# Altium PCB Ausgangsstufe.PcbDoc
Units mm, origin at the board's own origin, x right, y up, seen from the top; angles counter-clockwise.
Board outline 150 x 75 mm, 2 copper layers (Top Layer, Bottom Layer); 196 components, 134 nets, 537 pads, 8 vias.
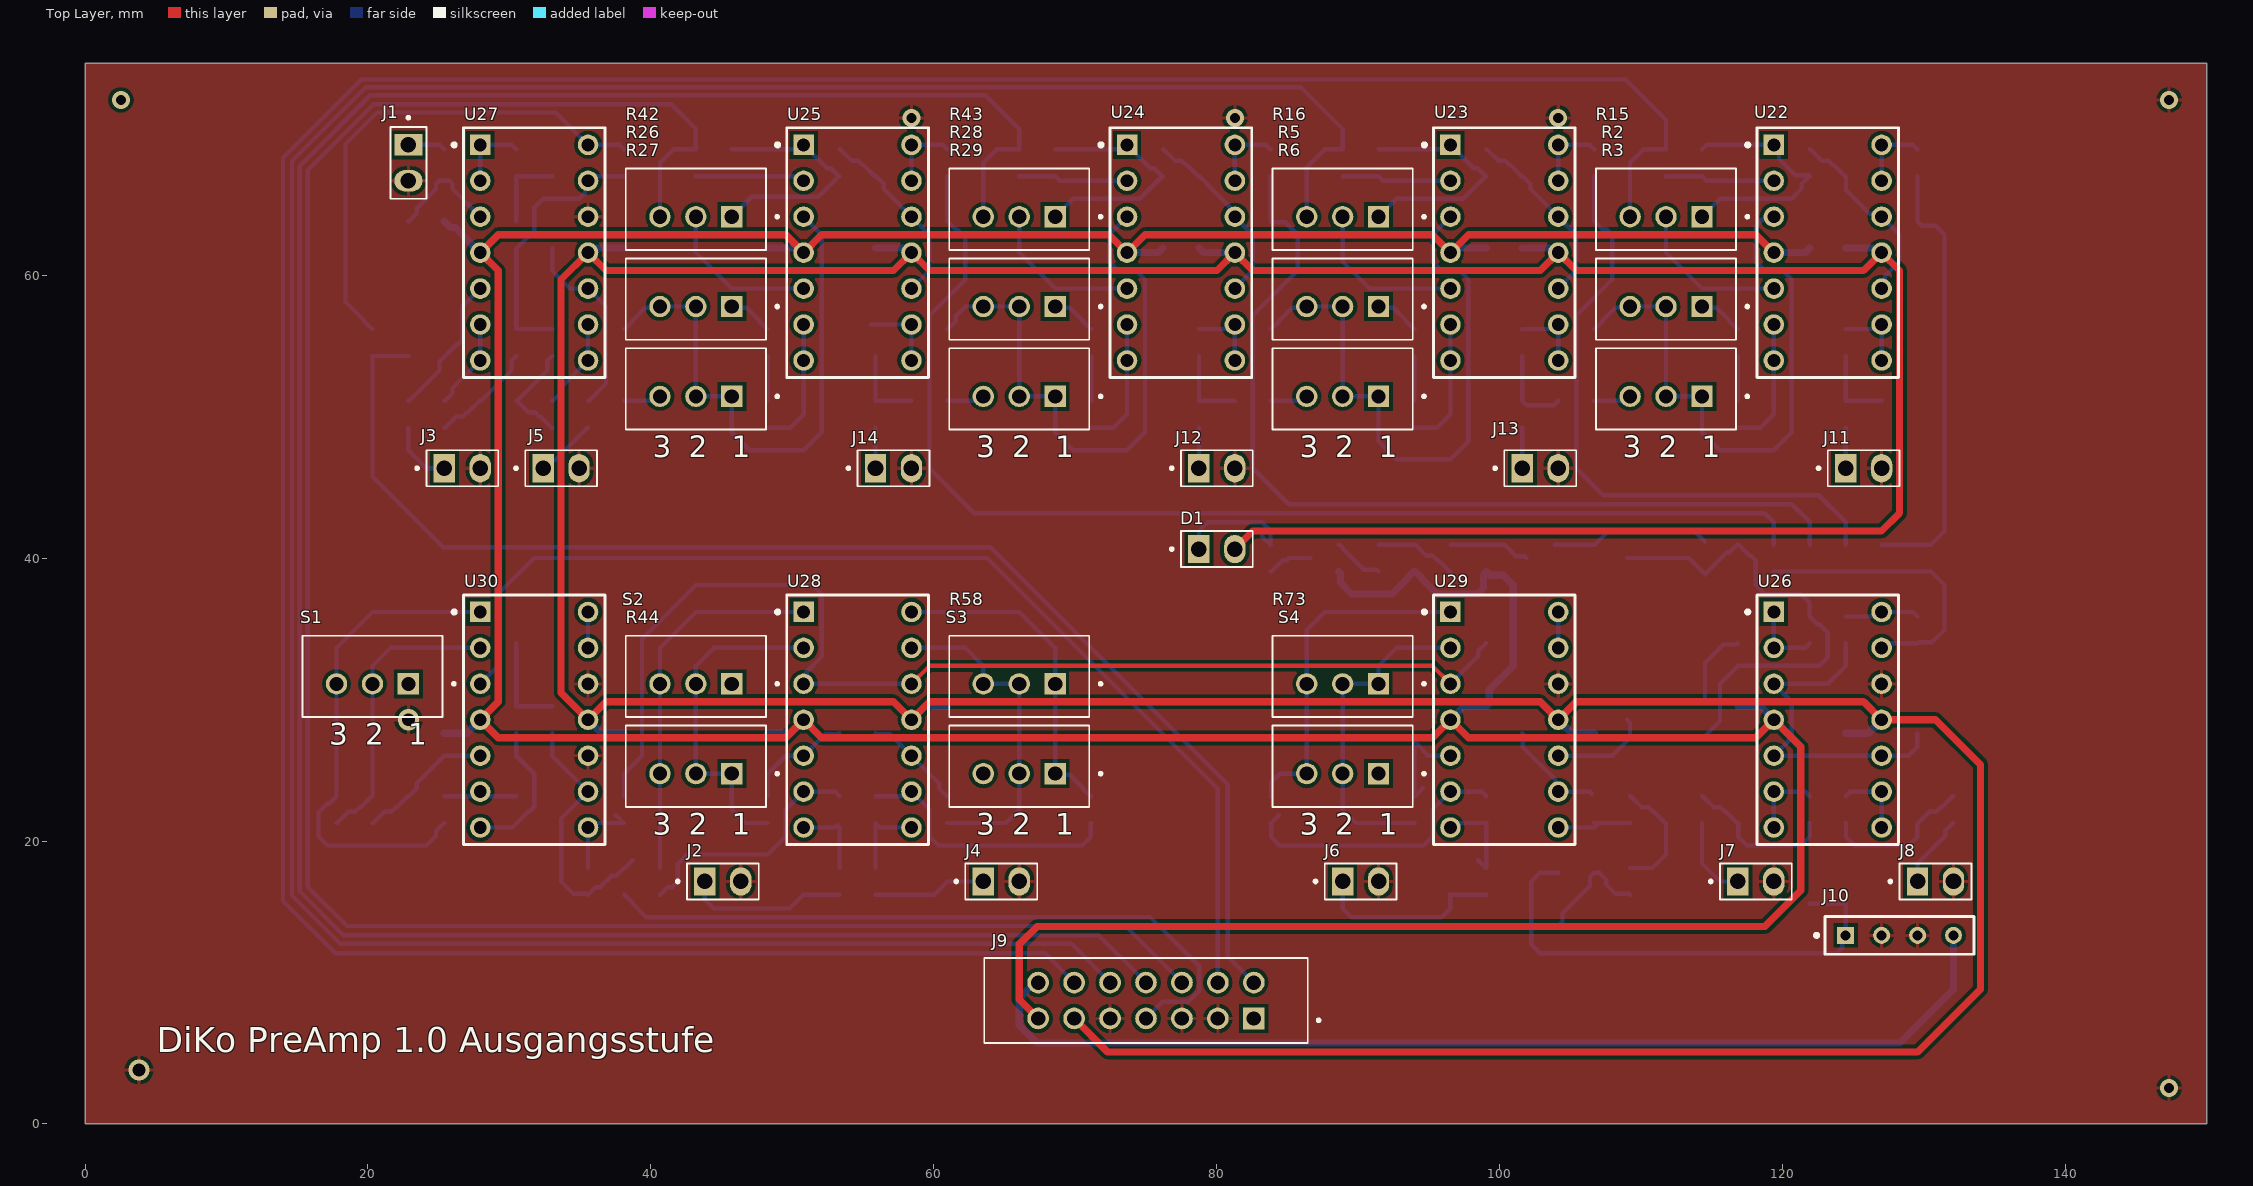
[diagram p0: Top Layer view]
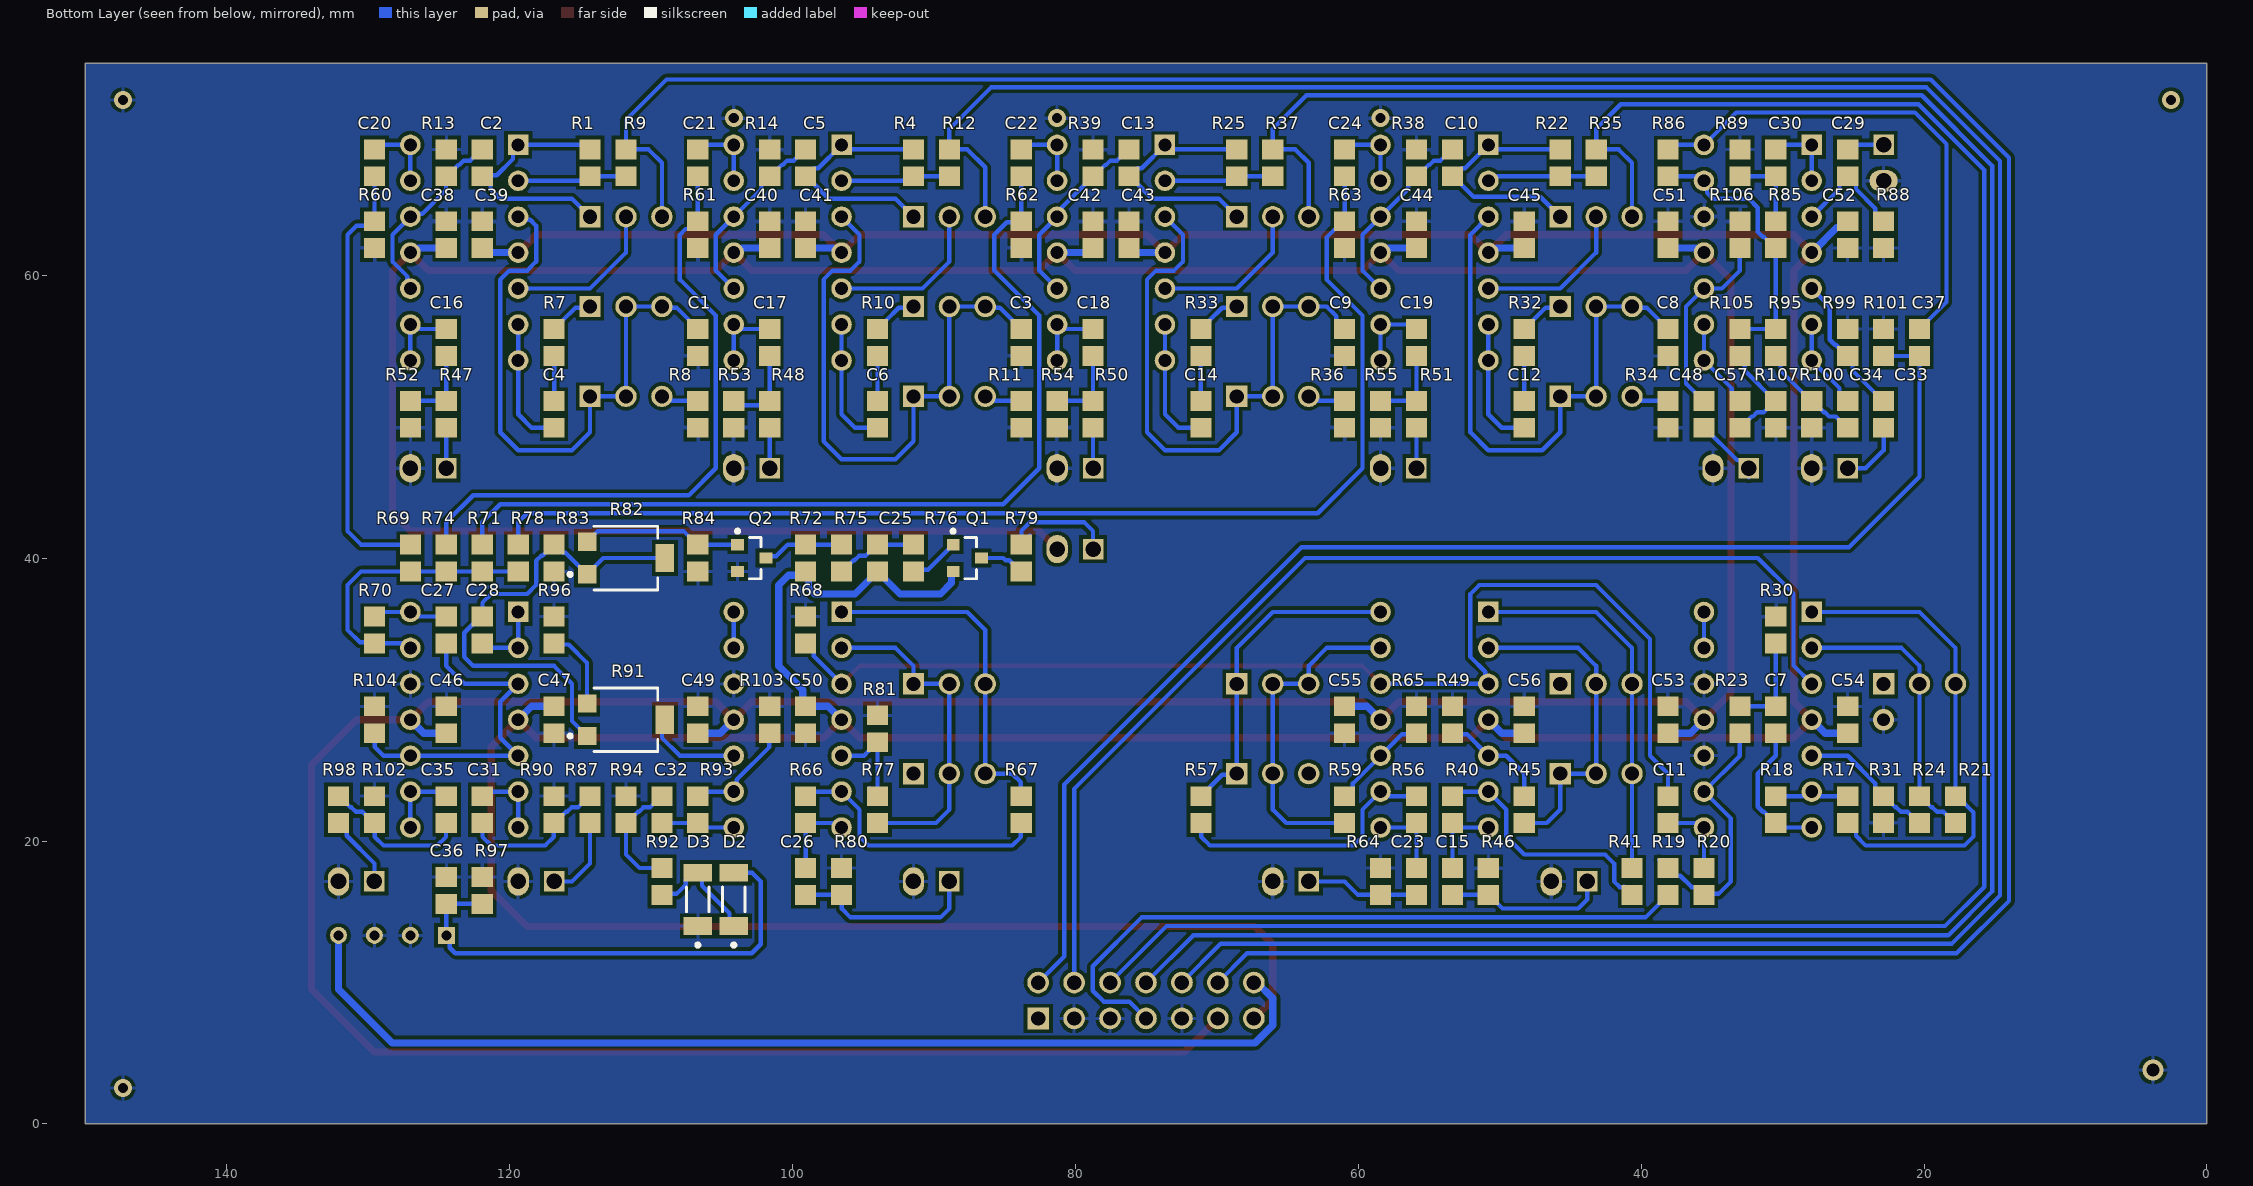
[diagram p1: Bottom Layer view, seen from below]
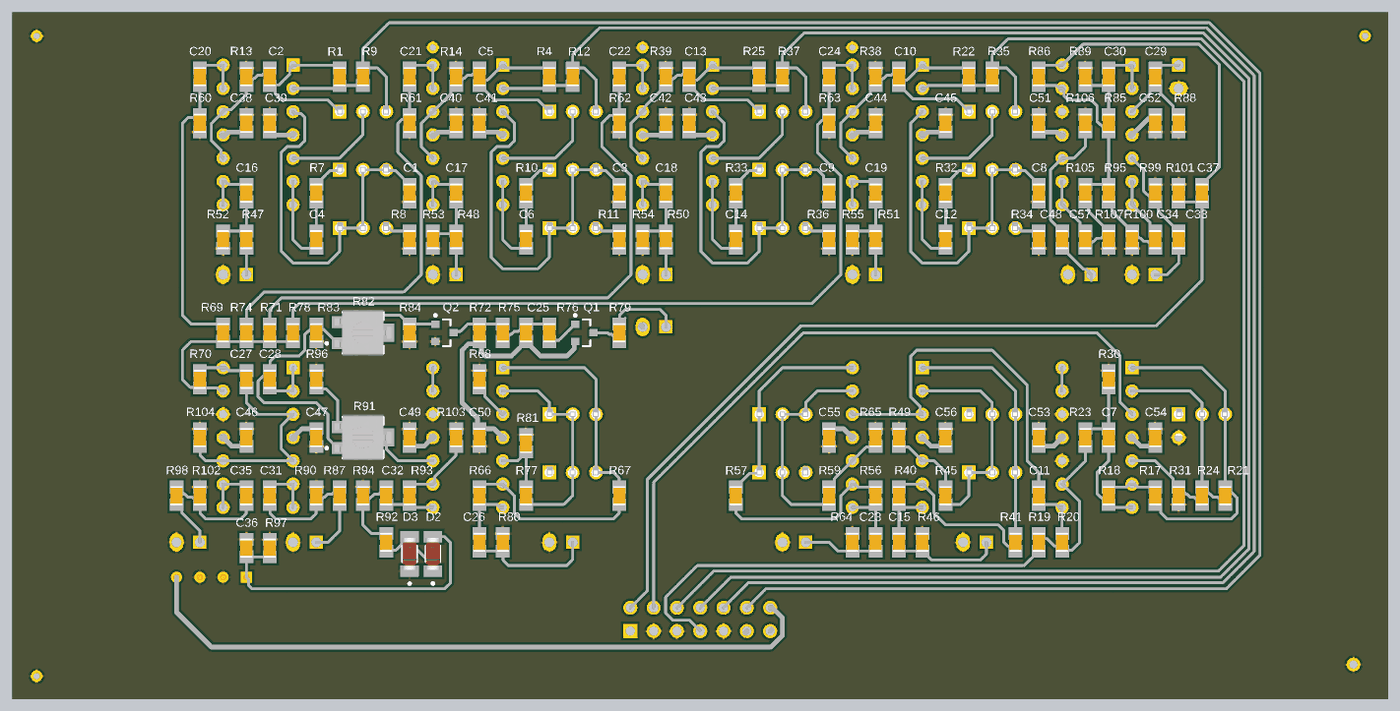
[diagram p2: 3D render of the assembled board from below, using the file's embedded part models]

## Layer stack, top to bottom
Top Solder: solder mask 0.0102, Solder Resist, Dk 3.5
Top Layer: signal copper 0.0356
Dielectric 1: dielectric 0.32, FR-4, Dk 4.8
Bottom Layer: signal copper 0.0356
Bottom Solder: solder mask 0.0102, Solder Resist, Dk 3.5

## Board outline
0,0 150,0 150,75 0,75

## Design rules (kind name [scope] priority, off if disabled: settings)
Clearance [All] p1: gap=0.254 ignorepadtopadclearanceinfootprint=FALSE except(0: Arc-Hole Track-Hole SMDPad-Hole THPad-Hole Via-Hole Fill-Hole Poly-Hole Region-Hole Text-Hole)
HoleSize [All] p1: absolutevalues=TRUE maxlimit=5.08 minlimit=0.152 maxpercent=80.000 minpercent=20.000
HoleToHoleClearance [All] p1: gap=0.203 allowstackedmicrovias=TRUE
MinimumSolderMaskSliver [All] p1: minsoldermaskwidth=0.102
PolygonConnect [All] p1: connectstyle=Relief reliefconductorwidth=0.254 reliefentries=4 polygonreliefangle="90 Angle" airgapwidth=0.254
RoutingVias [All] p1: holewidth=0.9 width=1.5 viastyle="Through Hole" minholewidth=0.711 minwidth=1.27 maxholewidth=0.914 maxwidth=1.524
SilkToSilkClearance [All] p1: silktosilkclearance=0.102
SilkToSolderMaskClearance [IsPad] p1: minsilkscreentomaskgap=0.152 clearancetoexposedcopper=TRUE
SolderMaskExpansion [All] p1: expansion=0.051 istentingtop=FALSE
UnRoutedNet [All] p1: checkbadconnections=TRUE
Width +18V [InNet('+18V')] p1: maxlimit=0.508 minlimit=0.508 preferedwidth=0.508
Width -18V [InNet('-18V')] p2: maxlimit=0.508 minlimit=0.508 preferedwidth=0.508
Width +6V [InNet('+6V')] p3: maxlimit=0.508 minlimit=0.508 preferedwidth=0.508
Width +5V_DP [InNet('5V_DP')] p4: maxlimit=0.508 minlimit=0.381 preferedwidth=0.381
Width [All] p5: maxlimit=0.305 minlimit=0.254 preferedwidth=0.305
24 further rules are at their usual default settings.

## Classes and differential pairs
component class KST/AUX: C7 C11 R17 R18 R19 R20 R21 R23 R24 R30 R31 S1 U30
component class AUX_Return: C29 C30 C33 C34 C37 C48 C57 R85 R86 R88 R89 R95 R99 R100 R101 R105 R106 R107 U27
component class VU_Meter: C32 C36 D2 D3 J10 R91 R92 R93 R94 R96 R97 R103 U29

## Components (designator, comment, footprint, x,y, rotation, side; value= is the part's Value field where it differs from the comment)
C1 "130n" 0805 106.68,55.245 r90 bottom
C2 "10u" 0805 121.92,67.945 r90 bottom
C3 "2.2n" 0805 83.82,55.245 r90 bottom
C4 "390n" 0805 116.84,50.165 r90 bottom
C5 "10u" 0805 99.06,67.945 r90 bottom
C6 "6.8n" 0805 93.98,50.165 r90 bottom
C7 "10u" 0805 30.48,28.575 r90 bottom
C8 "750p" 0805 38.1,55.245 r90 bottom
C9 "30n" 0805 60.96,55.245 r90 bottom
C10 "10u" 0805 53.34,67.945 r90 bottom
C11 "10u" 0805 38.1,22.225 r270 bottom
C12 "2.2n" 0805 48.26,50.165 r90 bottom
C13 "10u" 0805 76.2,67.945 r90 bottom
C14 "91n" 0805 71.12,50.165 r90 bottom
C15 "10u" 0805 53.34,17.145 r270 bottom
C16 "10u" 0805 124.46,55.245 r270 bottom
C17 "10u" 0805 101.6,55.245 r270 bottom
C18 "10u" 0805 78.74,55.245 r270 bottom
C19 "10u" 0805 55.88,55.245 r270 bottom
C20 "10u" 0805 129.54,67.945 r270 bottom
C21 "10u" 0805 106.68,67.945 r270 bottom
C22 "10u" 0805 83.82,67.945 r270 bottom
C23 "10u" 0805 55.88,17.145 r270 bottom
C24 "10u" 0805 60.96,67.945 r270 bottom
C25 "1u" 0805 93.98,40.005 r270 bottom
C26 "10u" 0805 99.06,17.145 r270 bottom
C27 "10u" 0805 124.46,34.925 r270 bottom
C28 "10u" 0805 121.92,34.925 r90 bottom
C29 "10u" 0805 25.4,67.945 r270 bottom
C30 "10u" 0805 30.48,67.945 r90 bottom
C31 "10u" 0805 121.92,22.225 r270 bottom
C32 "10u" 0805 109.22,22.225 r90 bottom
C33 "10u" 0805 22.86,50.165 r90 bottom
C34 "10u" 0805 25.4,50.165 r90 bottom
C35 "10u" 0805 124.46,22.225 r270 bottom
C36 "4.7u" 0805 124.46,16.51 r270 bottom
C37 "10u" 0805 20.32,55.245 r270 bottom
C38 "100n" 0805 124.46,62.865 r270 bottom
C39 "100n" 0805 121.92,62.865 r270 bottom
C40 "100n" 0805 101.6,62.865 r270 bottom
C41 "100n" 0805 99.06,62.865 r270 bottom
C42 "100n" 0805 78.74,62.865 r270 bottom
C43 "100n" 0805 76.2,62.865 r270 bottom
C44 "100n" 0805 55.88,62.865 r270 bottom
C45 "100n" 0805 48.26,62.865 r270 bottom
C46 "100n" 0805 124.46,28.575 r270 bottom
C47 "100n" 0805 116.84,28.575 r90 bottom
C48 "10u" 0805 35.56,50.165 r270 bottom
C49 "100n" 0805 106.68,28.575 r270 bottom
C50 "100n" 0805 99.06,28.575 r90 bottom
C51 "100n" 0805 38.1,62.865 r270 bottom
C52 "100n" 0805 25.4,62.865 r90 bottom
C53 "100n" 0805 38.1,28.575 r270 bottom
C54 "100n" 0805 25.4,28.575 r270 bottom
C55 "100n" 0805 60.96,28.575 r90 bottom
C56 "100n" 0805 48.26,28.575 r270 bottom
C57 "10u" 0805 33.02,50.165 r90 bottom
D1 "WP710A10LGD" "Connector x2" 80.01,40.64 r0 top
D2 "1N4148WS-7-F" "1N4148 Diode" 104.14,15.875 r90 bottom
D3 "1N4148WS-7-F" "1N4148 Diode" 106.68,15.875 r90 bottom
J1 "Connector x2" "Connector x2" 22.86,67.945 r270 top
J2 "Connector x2" "Connector x2" 45.085,17.145 r0 top
J3 "Connector x2" "Connector x2" 26.67,46.355 r0 top
J4 "Connector x2" "Connector x2" 64.77,17.145 r0 top
J5 "Connector x2" "Connector x2" 33.655,46.355 r0 top
J6 "Connector x2" "Connector x2" 90.17,17.145 r0 top
J7 "Connector x2" "Connector x2" 118.11,17.145 r0 top
J8 "Connector x2" "Connector x2" 130.81,17.145 r0 top
J9 "Connector x14" "Connector x14" 75,10 r0 top
J10 "VU Meter" "Connector x4" 128.27,13.335 r0 top
J11 "Connector x2" "Connector x2" 125.73,46.355 r0 top
J12 "Connector x2" "Connector x2" 80.01,46.355 r0 top
J13 "Connector x2" "Connector x2" 102.87,46.355 r0 top
J14 "Connector x2" "Connector x2" 57.15,46.355 r0 top
Q1 "BC807-40LT1G" "SOT23 Transistor" 87.63,40.005 r180 bottom
Q2 "BC817-40,215" "SOT23 Transistor" 102.87,40.005 r180 bottom
R1 "22k" 0805 114.3,67.945 r90 bottom
R2 "22k log/str" "Connector x3" 111.76,57.785 r0 top
R3 "22k log/str" "Connector x3" 111.76,51.435 r0 top
R4 "22k" 0805 91.44,67.945 r90 bottom
R5 "470k log/str" "Connector x3" 88.9,57.785 r0 top
R6 "470k log/str" "Connector x3" 88.9,51.435 r0 top
R7 "6.8k" 0805 116.84,55.245 r90 bottom
R8 "6.8k" 0805 106.68,50.165 r90 bottom
R9 "22k" 0805 111.76,67.945 r270 bottom
R10 "6.8k" 0805 93.98,55.245 r90 bottom
R11 "6.8k" 0805 83.82,50.165 r90 bottom
R12 "22k" 0805 88.9,67.945 r270 bottom
R13 "220k" 0805 124.46,67.945 r270 bottom
R14 "220k" 0805 101.6,67.945 r270 bottom
R15 "47k lin" "Connector x3" 111.76,64.135 r0 top
R16 "47k lin" "Connector x3" 88.9,64.135 r0 top
R17 "10k" 0805 25.4,22.225 r90 bottom
R18 "10k" 0805 30.48,22.225 r270 bottom
R19 "10k" 0805 38.1,17.145 r270 bottom
R20 "10k" 0805 35.56,17.145 r90 bottom
R21 "10k" 0805 17.78,22.225 r90 bottom
R22 "22k" 0805 45.72,67.945 r90 bottom
R23 "10k" 0805 33.02,28.575 r90 bottom
R24 "5k" 0805 20.32,22.225 r270 bottom
R25 "22k" 0805 68.58,67.945 r90 bottom
R26 "22k log/str" "Connector x3" 43.18,57.785 r0 top
R27 "22k log/str" "Connector x3" 43.18,51.435 r0 top
R28 "47k log/str" "Connector x3" 66.04,57.785 r0 top
R29 "47k log/str" "Connector x3" 66.04,51.435 r0 top
R30 "220k" 0805 30.48,34.925 r270 bottom
R31 "5k" 0805 22.86,22.225 r90 bottom
R32 "6.8k" 0805 48.26,55.245 r90 bottom
R33 "6.8k" 0805 71.12,55.245 r90 bottom
R34 "6.8k" 0805 38.1,50.165 r90 bottom
R35 "22k" 0805 43.18,67.945 r270 bottom
R36 "6.8k" 0805 60.96,50.165 r90 bottom
R37 "22k" 0805 66.04,67.945 r270 bottom
R38 "220k" 0805 55.88,67.945 r270 bottom
R39 "220k" 0805 78.74,67.945 r270 bottom
R40 "10k" 0805 53.34,22.225 r270 bottom
R41 "4k7" 0805 40.64,17.145 r270 bottom
R42 "47k lin" "Connector x3" 43.18,64.135 r0 top
R43 "47k lin" "Connector x3" 66.04,64.135 r0 top
R44 "22k log" "Connector x3" 43.18,24.765 r0 top
R45 "470R" 0805 48.26,22.225 r90 bottom
R46 "220k" 0805 50.8,17.145 r270 bottom
R47 "470R" 0805 124.46,50.165 r270 bottom
R48 "470R" 0805 101.6,50.165 r270 bottom
R49 "1k" 0805 53.34,28.575 r270 bottom
R50 "470R" 0805 78.74,50.165 r270 bottom
R51 "470R" 0805 55.88,50.165 r270 bottom
R52 "220k" 0805 127,50.165 r90 bottom
R53 "220k" 0805 104.14,50.165 r90 bottom
R54 "220k" 0805 81.28,50.165 r90 bottom
R55 "220k" 0805 58.42,50.165 r90 bottom
R56 "10k" 0805 55.88,22.225 r270 bottom
R57 "4k7" 0805 71.12,22.225 r270 bottom
R58 "22k log" "Connector x3" 66.04,31.115 r0 top
R59 "470R" 0805 60.96,22.225 r90 bottom
R60 "220k" 0805 129.54,62.865 r90 bottom
R61 "220k" 0805 106.68,62.865 r90 bottom
R62 "220k" 0805 83.82,62.865 r90 bottom
R63 "220k" 0805 60.96,62.865 r90 bottom
R64 "220k" 0805 58.42,17.145 r270 bottom
R65 "1k" 0805 55.88,28.575 r270 bottom
R66 "10k" 0805 99.06,22.225 r270 bottom
R67 "4k7" 0805 83.82,22.225 r270 bottom
R68 "220k" 0805 99.06,34.925 r270 bottom
R69 "10k" 0805 127,40.005 r270 bottom
R70 "10k" 0805 129.54,34.925 r90 bottom
R71 "10k" 0805 121.92,40.005 r270 bottom
R72 "4k7" 0805 99.06,40.005 r270 bottom
R73 "22k log" "Connector x3" 88.9,31.115 r0 top
R74 "10k" 0805 124.46,40.005 r270 bottom
R75 "220" 0805 96.52,40.005 r90 bottom
R76 "4k7" 0805 91.44,40.005 r90 bottom
R77 "470R" 0805 93.98,22.225 r90 bottom
R78 "10k" 0805 119.38,40.005 r270 bottom
R79 "3k9" 0805 83.82,40.005 r90 bottom
R80 "220k" 0805 96.52,17.145 r270 bottom
R81 "1k" 0805 93.98,27.94 r270 bottom
R82 "50k lin" "SMD Trimmer 3314G" 111.76,40.005 r90 bottom
R83 "220k" 0805 116.84,40.005 r90 bottom
R84 "10k" 0805 106.68,40.005 r90 bottom
R85 "10k" 0805 30.48,62.865 r90 bottom
R86 "10k" 0805 38.1,67.945 r90 bottom
R87 "470R" 0805 114.3,22.225 r270 bottom
R88 "200k" 0805 22.86,62.865 r90 bottom
R89 "220k" 0805 33.02,67.945 r90 bottom
R90 "220k" 0805 116.84,22.225 r270 bottom
R91 "10k lin" "SMD Trimmer 3314G" 111.76,28.575 r90 bottom
R92 "1k8" 0805 109.22,17.145 r90 bottom
R93 "100k" 0805 106.68,22.225 r270 bottom
R94 "220k" 0805 111.76,22.225 r270 bottom
R95 "10k" 0805 30.48,55.245 r270 bottom
R96 "10k" 0805 116.84,34.925 r270 bottom
R97 "1k8" 0805 121.92,16.51 r90 bottom
R98 "470R" 0805 132.08,22.225 r270 bottom
R99 "200k" 0805 25.4,55.245 r270 bottom
R100 "220k" 0805 27.94,50.165 r270 bottom
R101 "220k" 0805 22.86,55.245 r270 bottom
R102 "220k" 0805 129.54,22.225 r270 bottom
R103 "18k" 0805 101.6,28.575 r270 bottom
R104 "220k" 0805 129.54,28.575 r270 bottom
R105 "10k" 0805 33.02,55.245 r270 bottom
R106 "200k" 0805 33.02,62.865 r270 bottom
R107 "220k" 0805 30.48,50.165 r270 bottom
S1 "Schalter Buchsenleiste" "Connector x3" 20.32,31.115 r0 top
S2 "Schalter Buchsenleiste" "Connector x3" 43.18,31.115 r0 top
S3 "Schalter Buchsenleiste" "Connector x3" 66.04,24.765 r0 top
S4 "Schalter Buchsenleiste" "Connector x3" 88.9,24.765 r0 top
U22 "OPA4134UA" "DIP14 IC Socket" 123.19,61.595 r90 top
U23 "OPA4134UA" "DIP14 IC Socket" 100.33,61.595 r90 top
U24 "OPA4134UA" "DIP14 IC Socket" 77.47,61.595 r90 top
U25 "OPA4134UA" "DIP14 IC Socket" 54.61,61.595 r90 top
U26 "OPA4134UA" "DIP14 IC Socket" 123.19,28.575 r90 top
U27 "OPA4134UA" "DIP14 IC Socket" 31.75,61.595 r90 top
U28 "OPA4134UA" "DIP14 IC Socket" 54.61,28.575 r90 top
U29 "OPA4134UA" "DIP14 IC Socket" 100.33,28.575 r90 top
U30 "OPA4134UA" "DIP14 IC Socket" 31.75,28.575 r90 top

## Footprints (in the part's own frame and the unit in brackets; to place one, negate y for a bottom-side part, rotate by r counter-clockwise, add the part's x,y. Pads: shape width x height; smd on the part's side, far side on the other; paste and mask are expansions set on the pad)
"1N4148 Diode" [mm]
  rect 1.25x2 smd paste+0 mask+0: 1(-1.875,0) 2(1.875,0)
  silkscreen extent -3.35,-0.8 0.87,0.8, body extent -1.75,-0.8 1.75,0.8, height 1.6
0805 [mm] "0805"
  rect 1.4x1.5 smd: 1(-0.95,0) 2(0.95,0)
  body extent -1.05,-0.67 1.05,0.67, height 1.35
"Connector x2" [mm]
  rect 1.508x2 / inner round 1.45 / far side rect 1.45x1.45 hole 1.1: 1(-1.27,0)
  oval 1.508x2 hole 1.1: 2(1.27,0)
  silkscreen extent -3.29,-1.27 2.54,1.27
"Connector x3" [mm] "Connector x3"
  rect 1.508x1.508 / inner round 1.508 / far side rect 1.508x1.508 hole 1: 1(2.54,0)
  round 1.508 hole 1: 2(0,0) 3(-2.54,0)
  silkscreen extent -4.95,-2.35 5.85,3.4, body extent -4.95,-2.35 4.95,3.4, height 7
"Connector x4" [mm]
  rect 1.2x1.2 hole 0.7 paste-1000 mask+0: 1(-3.81,0)
  round 1.2 hole 0.7 paste-1000 mask+0: 2(-1.27,0) 3(1.27,0) 4(3.81,0)
  silkscreen extent -5.99,-1.34 5.27,1.34, body extent -5.08,-1.27 5.08,1.27, height 4.45
"Connector x14" [mm]
  rect 1.53x1.53 hole 1.02: 1(7.62,-2.54)
  round 1.53 hole 1.02: 2(7.62,0) 3(5.08,-2.54) 4(5.08,0) 5(2.54,-2.54) 6(2.54,0) 7(0,-2.54) 8(0,0) 9(-2.54,-2.54) 10(-2.54,0) 11(-5.08,-2.54) 12(-5.08,0) 13(-7.62,-2.54) 14(-7.62,0)
  silkscreen extent -11.43,-4.27 12.3,1.73
"DIP14 IC Socket" [mm] "Socket, 14-Leads, Body 17.653x10.0076mm, Pitch 2.54mm"
  rect 1.45x1.45 hole 0.911: 1(7.62,3.81)
  round 1.45 hole 0.911: 2(5.08,3.81) 3(2.54,3.81) 4(0,3.81) 5(-2.54,3.81) 6(-5.08,3.81) 7(-7.62,3.81) 8(-7.62,-3.81) 9(-5.08,-3.81) 10(-2.54,-3.81) 11(0,-3.81) 12(2.54,-3.81) 13(5.08,-3.81) 14(7.62,-3.81)
  silkscreen extent -8.83,-5 8.83,5.78, body extent -8.83,-5 8.83,5, height 5.36
"SMD Trimmer 3314G" [mm] "SMD, 3-Leads, Body 4.5x4.5mm, Pitch 1.15mm"
  rect 1.3x1.3 smd: 1(-1.15,2.75) 3(1.15,2.75)
  rect 2x1.3 smd: 2(0,-2.75)
  silkscreen extent -2.25,-2.25 2.25,4.08, body extent -2.5,-3.1 2.5,3.1, height 2.73
"SOT23 Transistor" [mm] "SOT23, 3-Leads, Body 2.92x1.3mm, Pitch 0.95mm"
  rect 0.9x0.8 smd: 1(-1,0.95) 2(-1,-0.95) 3(1,0)
  silkscreen extent -1.13,-1.46 0.65,2.02, body extent -0.65,-1.46 0.65,1.46, height 1.11

## Part data
C1 C2 C3 C4 C5 C6 C7 C8 C9 C10 C11 C12 C13 C14 C15 C16 C17 C18 C19 C20 C21 C22 C23 C24 C25 C26 C27 C28 C29 C30 C31 C32 C33 C34 C35 C36 C37 C38 C39 C40 C41 C42 C43 C44 C45 C46 C47 C48 C49 C50 C51 C52 C53 C54 C55 C56 C57: library part "0805 Kondensator", "0805 Kondensator"
  C7 C11: ClassName=KST/AUX
  C29 C30 C33 C34 C37 C48 C57: ClassName=AUX_Return
  C32 C36: ClassName=VU_Meter
D1: library part "LED Buchsenleiste", "WP710A10LGD LED Thru-Hole PCB Green T-1 3mm Green Lens 2 mA 568 nm 2 mcd Round", Case/Package=Radial, Color=Green, Forward Current=2mA, Forward Voltage=1.9V, Max Junction Temperature (Tj)=110°C, Max Operating Temperature=85°C, Min Operating Temperature=-40°C, Power Dissipation=62.5mW, Reverse Voltage=5V, Dominant Wavelength=568nm, Height=4.6mm, Illumination Color=Green, Lead Free="Lead Free", Lens Color=Green, Lens Style="Diffused, Dome, Round, Tinted", Luminous Intensity=2mcd, Mount="Through Hole", NexarPartId=20090258, Number of LEDs=1, Number of Pins=3, Power Rating=62.5mW, RoHS=Compliant, Schedule B="8541402000, 8541402000|8541402000|8541402000|8541402000|8541402000", Test Current=2mA, Viewing Angle=40°, Wavelength=568nm
D2 D3: library part "1N4148 Diode", "Fast Switching Diode, 75 V, 0.3 A, -65 to 150 degC, 2-Pin SOD323, RoHS, Tape and Reel", ClassName=VU_Meter, ComponentLink1Description="Manufacturer URL", ComponentLink1URL=http://www.diodes.com/, ComponentLink2Description=Datasheet, ComponentLink2URL=http://www.diodes.com/datasheets/ds30097.pdf, DatasheetVersion="Rev. 25-2, 03/2016", PackageDescription="2-Pin Small Outline Diode, Body 1.7 x 1.3 mm", PackageReference=SOD323-2
J1 J2 J3 J4 J5 J6 J7 J8 J11 J12 J13 J14: "Connector Header Through Hole 2 position 0.100 (2.54mm)", Package=None, Check_prices=https://www.snapeda.com/parts/61300211121/Wurth+Elektronik/view-part/?ref=eda, MF="Wurth Elektronik", MP=61300211121, SnapEDA_Link=https://www.snapeda.com/parts/61300211121/Wurth+Elektronik/view-part/?ref=snap
J9: "14 Position Header Connector Through Hole", Package=None, Availability=Warning, Check_prices=https://www.snapeda.com/parts/SFH11-PBPC-D07-ST-BK/Sullins%20Connector%20Solutions/view-part/851415/?ref=eda, MF="Sullins Connector", MP=SFH11-PBPC-D07-ST-BK, Price=None, Purchase-URL=https://pricing.snapeda.com/search/part/SFH11-PBPC-D07-ST-BK/?ref=eda, SnapEDA_Link=https://www.snapeda.com/parts/SFH11-PBPC-D07-ST-BK/Sullins%20Connector%20Solutions/view-part/851415/?ref=snap, System=Connector
J10: library part "Connector x4", "CONN RCPT 4POS 0.1 GOLD PCB", Color=Black, Contact Resistance=10mR, Max Current Rating=1A, Max Operating Temperature=125°C, Min Operating Temperature=-55°C, Package Quantity=1, ClassName=VU_Meter, Connector Type=Receptacle, Contact Material=Copper, Contact Plating=Gold, Depth=2.54mm, Gender=Female, Housing Color=Black, Housing Material=Polyester, Lead Free="Lead Free", Length=10.16mm, Mount="Through Hole", Number of Contacts=4, Number of Positions=4, Number of Rows=1, Orientation=Straight, Packaging=Bulk, Pitch=2.54mm, Radiation Hardening=No, RoHS Compliant=Yes, Series=SS, Termination=Solder, Width=2.54mm
Q1: library part "SOT23 BC807 PNP", "General Purpose Transistor, PNP Silicon, 3-Pin SOT-23, Pb-Free, Tape and Reel", Manufacturer="On Semiconductor", ComponentLink1Description="Manufacturer URL", ComponentLink1URL=http://www.onsemi.com/, ComponentLink2Description=Datasheet, ComponentLink2URL=http://www.onsemi.com/pub_link/Collateral/BC807-16LT1-D.PDF, ComponentLink3Description="Package Specification", ComponentLink3URL=http://www.onsemi.cn/pub_link/Collateral/318-08.PDF, DatasheetVersion="Rev. 10", fT Min (MHz)=100, IC Continuous (A)=-0.5, Mounting Technology="Surface Mount", PackageDescription="3-Pin Small Outline Transistor, Body 2.92 x 1.3 mm, Pitch 0.95 mm", PackageReference=SOT-23-3-318-08, PackageVersion="Rev. AP, 11/2009", Packing="Tape and Reel", PartNumber=BC807-40LT1G, Polarity=PNP, RoHS=TRUE
Q2: library part "SOT23 BC817 NPN", "TRANS NPN 45V 0.5A SOT23", Ambient Temperature Range High=+150°C, Ambient Temperature Range Low=-65°C, Collector Base Voltage=50V, Collector Emitter Breakdown Voltage=45V, Collector Emitter Saturation Voltage=700mV, Emitter Base Voltage=5V, Manufacturer=Nexperia, Max Collector Current=500mA, Package=SOT23, Power Dissipation=250mW, Temperature="to +150°C", Unity Gain Freq=100MHz, Automotive=Yes, Automotive Grade="Grade 0", Category=Trans, Collector Emitter Voltage=45V, ComponentLink2Description=Datasheet, ComponentLink2URL=https://assets.nexperia.com/documents/data-sheet/BC817_SER.pdf, Device Class L1="Discrete Semiconductors", Device Class L2=Transistors, Device Class L3=BJTs, Digikey Description="TRANS NPN 45V 0.5A SOT23", Footprint Url=https://assets.nexperia.com/documents/outline-drawing/SOT23.pdf, Height=1.1mm, Hfe Max=600, Hfe Min=250, Hfe Testic=100mA, Hfe Testvce=1V, Ipc Land Pattern Name=SOT95P230X100-3, Lead Free=Yes, Manufacturer Part Number=BC817-40,215, Max Junction Temp=+150°C, Mouser Description="BC817 Series 45 V 500 mA 250 mW SMT NPN General-Purpose Transistor - SOT-23-", Number Of Elements=1, Number Of Npn=1, Octopart=https://octopart.com/bc817-40%2C215-nexperia-78739081, RoHS=TRUE, Rthja Max=500K/W, Temperature Range High=+150°C
R1 R4 R7 R8 R9 R10 R11 R12 R13 R14 R17 R18 R19 R20 R21 R22 R23 R24 R25 R30 R31 R32 R33 R34 R35 R36 R37 R38 R39 R40 R41 R45 R46 R47 R48 R49 R50 R51 R52 R53 R54 R55 R56 R57 R59 R60 R61 R62 R63 R64 R65 R66 R67 R68 R69 R70 R71 R72 R74 R75 R76 R77 R78 R79 R80 R81 R83 R84 R85 R86 R87 R88 R89 R90 R92 R93 R94 R95 R96 R97 R98 R99 R100 R101 R102 R103 R104 R105 R106 R107: library part "0805 Widerstand", "0805 Widerstand"
  R17 R18 R19 R20 R21 R23 R24 R30 R31: ClassName=KST/AUX
  R85 R86 R88 R89 R95 R99 R100 R101 R105 R106 R107: ClassName=AUX_Return
  R92 R93 R94 R96 R97 R103: ClassName=VU_Meter
R2 R3 R5 R6 R15 R16 R26 R27 R28 R29 R42 R43 R44 R58 R73: library part "Potentiometer Buchsenleiste", "Potentiometer"
R82 R91: library part "SMD Trimmer 3314G", "4 mm Square Trimpot(R) Trimming Potentiometer, 5 KOhm, +/- 20%, 0.25 W, -55 to 125 degC, 3-Pin SMD, RoHS, Tape and Reel"
  R91: ClassName=VU_Meter
S1 S2 S3 S4: "Toggle Switch SPDT Through Hole", Package=None, Availability=Unavailable, MP=100SP1T1B4M2QE, Price=None
  S1: ClassName=KST/AUX
U22 U23 U24 U25 U26 U27 U28 U29 U30: library part "SOIC OPA4134UA", "SoundPlus(TM) High Performance Audio Operational Amplifier, 5 to 36 V, -55 to 125 degC, 14-pin SOIC (D14), Green (RoHS & no Sb/Br)", Manufacturer="Texas Instruments", Code_JEDEC=MS-012, ComponentLink1Description="Manufacturer URL", ComponentLink1URL=http://www.ti.com/, ComponentLink2Description=Datasheet, ComponentLink2URL=http://www.ti.com/general/docs/lit/getliterature.tsp?genericPartNumber=OPA4134&fileType=pdf, ComponentLink3Description="Package Specification", ComponentLink3URL=http://www.ti.com/lit/ml/mpds177g/mpds177g.pdf, DatasheetVersion=SBOS058, Eco-Plan="Green (RoHS & no Sb/Br)", GBW(Typ)(MHz)=8, Iq per channel(Max)(mA)=5, Mounting Technology="Surface Mount", Number of Channels=4, PackageDescription="14-Pin Plastic Small Outline, Body 8.65 x 3.9 mm, Pitch 1.27 mm", PackageReference=D0014A, PackageVersion="4040047-5/M, 06/2011", PartNumber=OPA4134UA, SubFamily="Audio Operational Amplifier", Vmax(V)=36, Vmin(V)=5, Vn at Flatband(Typ)(nV/rtHz)=8
  U27: ClassName=AUX_Return
  U29: ClassName=VU_Meter
  U30: ClassName=KST/AUX

## Via types
v1: diameter 1.27, hole 0.711, Top Layer to Bottom Layer, 6 vias
v2: diameter 1.5, hole 0.9, Top Layer to Bottom Layer, 2 vias

## Nets (pads, with @x,y where several pads share a name; then routed paths per layer and width w, separated by ;. In a path a pad name is that pad's centre, name@x,y a point inside that pad or via, vN(x,y) a via of type N, cw(c..) or ccw(c..) an arc to the next point about the centre after c; other vN are vias at no path point)
+6V: J9.14 J10.4 | length 75.7
  Bottom Layer w0.508: J9.14 67.15,10 66.04,8.89 66.04,6.985 67.31,5.715 128.27,5.715 132.08,9.525 J10.4
+18V: C25.2 C39.2 C41.2 C43.2 C45.2 C47.2 C50.2 C52.2 C54.2 C56.2 J9.13 Q1.2 R72.2 U22.4 U23.4 U24.4 U25.4 U26.4 U27.4 U28.4 U29.4 U30.4 | length 351.4
  Top Layer w0.508: J9.13 66.04,8.8 66.04,12.7 67.31,13.97 118.745,13.97 121.285,16.51 121.285,26.67 U26.4 118.11,27.305 97.79,27.305 U29.4 95.25,27.305 52.07,27.305 U28.4 49.53,27.305 29.21,27.305 U30.4 29.21,29.845 29.21,60.325 U27.4 29.21,62.865 49.53,62.865 U25.4 52.07,62.865 72.39,62.865 U24.4 74.93,62.865 95.25,62.865 U23.4 97.79,62.865 118.11,62.865 U22.4
  Bottom Layer w0.508: C54.2 26.99,27.625 U30.4 ; C52.2 25.846,63.369 26.166,63.369 U27.4 ; C56.2 49.85,27.625 U28.4 ; C45.2 50.225,61.915 50.545,61.595 U25.4 ; U24.4 75.88,61.595 C43.2 ; Q1.2 88.743,38.942 88.743,38.257 89.535,37.465 92.39,37.465 93.484,38.559 93.484,38.609 93.93,39.055 94.03,39.055 94.476,38.609 94.476,38.559 95.57,37.465 98.425,37.465 98.851,37.891 98.851,38.846 R72.2 99.324,38.791 100.274,38.791 100.965,38.1 100.965,32.385 99.269,30.689 99.269,29.734 C50.2 97.47,29.525 U29.4 ; U23.4 96.775,61.595 97.095,61.915 C41.2 ; C47.2 118.43,29.525 U26.4 ; U22.4 121.6,61.595 C39.2
-18V: C38.2 C40.2 C42.2 C44.2 C46.2 C49.2 C51.2 C53.2 C55.2 D1.2 J9.11 U22.11 U23.11 U24.11 U25.11 U26.11 U27.11 U28.11 U29.11 U30.11 | length 408
  Top Layer w0.508: J9.11 72.3,5.08 129.54,5.08 133.985,9.525 133.985,25.4 130.81,28.575 U26.11 125.73,29.845 105.41,29.845 U29.11 102.87,29.845 59.69,29.845 U28.11 57.15,29.845 36.83,29.845 U30.11 33.655,30.48 33.655,59.69 U27.11 36.83,60.325 57.15,60.325 U25.11 59.69,60.325 80.01,60.325 U24.11 82.55,60.325 102.87,60.325 U23.11 105.41,60.325 125.73,60.325 U22.11 128.27,60.325 128.27,43.18 127,41.91 82.55,41.91 D1.2
  Bottom Layer w0.508: U30.11 36.51,27.625 C53.2 ; U27.11 35.815,61.595 36.135,61.915 C51.2 ; C44.2 57.845,61.915 58.165,61.595 U25.11 ; U28.11 59.37,29.525 C55.2 ; C42.2 79.06,61.595 U24.11 ; C40.2 103.565,61.915 103.885,61.595 U23.11 ; U29.11 105.09,27.625 C49.2 ; C46.2 126.05,27.625 U26.11 ; C38.2 126.425,61.915 126.745,61.595 U22.11
A06: R15.2 U22.5 | length 11.2
  Bottom Layer w0.305: R15.2 111.76,61.595 114.3,59.055 U22.5
A07: C1.2 R2.2 R2.3 R3.1 R3.2 U22.3 | length 42.5
  Bottom Layer w0.305: C1.2 106.73,56.195 107.278,56.743 107.278,56.793 108.193,57.708 109.143,57.708 R2.3 R2.2 R3.2 R3.1 114.3,48.895 115.57,47.625 119.38,47.625 120.65,48.895 120.65,59.69 120.015,60.325 118.745,60.325 118.11,60.96 118.11,63.5 118.531,63.921 119.166,63.921 U22.3
A08: R43.2 U24.5 | length 11.2
  Bottom Layer w0.305: R43.2 66.04,61.595 68.58,59.055 U24.5
A09: C9.2 R28.2 R28.3 R29.1 R29.2 U24.3 | length 42.3
  Bottom Layer w0.305: C9.2 60.996,56.195 61.543,56.743 61.543,57.098 62.23,57.785 R28.2 R29.2 R29.1 68.58,48.895 69.85,47.625 73.66,47.625 74.93,48.895 74.93,59.69 74.295,60.325 73.025,60.325 72.39,60.96 72.39,62.865 U24.3
A10: R16.2 U23.5 | length 11.6
  Bottom Layer w0.305: R16.2 88.9,60.96 90.805,59.055 U23.5
A11: C3.2 R5.2 R5.3 R6.1 R6.2 U23.3 | length 43.4
  Bottom Layer w0.305: C3.2 83.87,56.195 84.418,56.743 84.418,56.793 85.333,57.708 86.283,57.708 R5.3 R5.2 R6.2 R6.1 91.44,48.26 92.71,46.99 96.52,46.99 97.79,48.26 97.79,59.69 97.155,60.325 95.885,60.325 95.25,60.96 95.25,62.865 U23.3
A12: R42.2 U25.5 | length 11.2
  Bottom Layer w0.305: R42.2 43.18,61.595 45.72,59.055 U25.5
A13: C8.2 R26.2 R26.3 R27.1 R27.2 U25.3 | length 40.4
  Bottom Layer w0.305: C8.2 38.15,56.195 38.698,56.743 38.698,56.793 39.613,57.708 40.563,57.708 R26.3 R26.2 R27.2 R27.1 45.72,48.895 46.99,47.625 50.8,47.625 52.07,48.895 52.07,62.865 U25.3
ASEQ_Bass: J9.12 R9.1 R15.3 | length 220.9
  Bottom Layer w0.305: J9.12 67.855,12.065 17.704,12.065 13.995,15.773 13.995,68.301 19.533,73.838 108.899,73.838 111.76,70.976 R9.1 110.17,68.895 109.22,67.945 R15.3
ASEQ_Höhen: J9.10 R12.1 R16.3 | length 197.9
  Bottom Layer w0.305: J9.10 69.709,12.751 18.034,12.751 14.63,16.154 14.63,68.072 19.837,73.279 85.962,73.279 88.9,70.341 R12.1 87.63,68.895 86.36,67.625 R16.3
ASEQ_Kick: J9.6 R35.1 R42.3 | length 153.5
  Bottom Layer w0.305: R42.3 40.64,67.945 41.59,68.895 R35.1 43.18,70.341 41.436,72.085 20.396,72.085 15.748,67.437 15.748,16.764 18.517,13.995 73.545,13.995 J9.6
ASEQ_Mitten: J9.8 R37.1 R43.3 | length 175.9
  Bottom Layer w0.305: R43.3 63.5,67.945 64.45,68.895 R37.1 66.04,70.341 63.661,72.72 20.168,72.72 15.189,67.742 15.189,16.434 18.288,13.335 71.665,13.335 J9.8
Aux_Mic: J9.7 R19.2 | length 49.1
  Bottom Layer w0.305: R19.2 38.15,16.195 38.698,15.647 38.698,15.597 39.69,14.605 75.311,14.605 78.765,11.151 78.765,9.423 77.978,8.636 76.176,8.636 J9.7
AUX_Return_1: C29.1 J1.1 | length 2.7
  Bottom Layer w0.305: J1.1 25.08,69.215 C29.1
AUX_Return_2: C33.1 J3.1 | length 4.7
  Bottom Layer w0.305: C33.1 22.86,47.625 24.13,46.355 J3.1
AUX_Return_3: C48.2 J5.1 | length 5
  Bottom Layer w0.305: J5.1@32.385,45.72 J5.1 32.958,46.928 33.126,46.928 33.136,46.938 33.233,46.938 35.51,49.215 C48.2
AUX_Send_1: C15.2 J2.1 R46.2 | length 11.5
  Bottom Layer w0.305: J2.1 43.815,15.875 44.45,15.24 49.795,15.24 50.75,16.195 C15.2
AUX_Send_2: C23.2 J4.1 R64.2 | length 8
  Bottom Layer w0.305: C23.2 60.01,16.195 60.96,17.145 J4.1
AUX_Send_3: C26.2 J6.1 R80.2 | length 13.6
  Bottom Layer w0.305: J6.1 88.9,15.24 89.535,14.605 95.885,14.605 96.496,15.216 96.496,16.171 R80.2 ; R80.2@96.47,16.195 C26.2
AUX_Sum: C37.2 J9.2 R101.2 | length 95.3
  Bottom Layer w0.305: R101.2 C37.2 20.32,45.756 25.309,40.767 64.008,40.767 80.772,24.003 80.772,11.848 J9.2
Bass: C2.2 R13.2 U22.10 U22.12 | length 13.7
  Bottom Layer w0.305: C2.2 121.97,68.895 122.764,68.101 123.229,68.101 123.542,67.789 123.616,67.789 124.41,66.995 R13.2 124.484,66.971 124.484,66.016 126.151,64.349 126.786,64.349 128.27,62.865 128.27,60.96 127.214,59.904 127.214,59.269 U22.10
Bass_Iso: J11.1 R47.2 | length 2.9
  Bottom Layer w0.305: J11.1 R47.2
Bass_Line: C20.2 R60.2 R69.1 | length 31.3
  Bottom Layer w0.305: R69.1 130.49,40.955 131.445,41.91 131.445,62.865 130.81,63.5 129.855,63.5 R60.2 C20.2
Höhen: C10.2 R38.2 U25.10 U25.12 | length 13.4
  Bottom Layer w0.305: C10.2 53.39,68.895 54.184,68.101 54.649,68.101 54.962,67.789 55.036,67.789 55.83,66.995 55.916,66.995 56.463,66.447 56.463,66.092 59.69,62.865 59.69,60.325 U25.10
Höhen_Iso: J14.1 R51.2 | length 2.9
  Bottom Layer w0.305: J14.1 R51.2
Höhen_Line: C24.2 R63.2 R78.1 | length 85.1
  Bottom Layer w0.305: C24.2 R63.2 61.508,63.267 61.632,63.267 62.23,62.67 62.23,59.69 59.69,57.15 59.69,46.355 62.865,43.18 118.745,43.18 119.38,42.545 R78.1
Kick: C13.2 R39.2 U24.10 U24.12 | length 13.4
  Bottom Layer w0.305: C13.2 76.25,68.895 77.044,68.101 77.509,68.101 77.822,67.789 77.896,67.789 78.69,66.995 78.79,66.995 79.338,66.447 79.338,66.397 81.061,64.674 81.061,64.354 82.55,62.865 82.55,60.325 U24.10
Kick_Iso: J12.1 R50.2 | length 2.9
  Bottom Layer w0.305: J12.1 R50.2
Kick_Line: C22.2 R62.2 R71.1 | length 65.8
  Bottom Layer w0.305: C22.2 R62.2 83.894,63.741 84.849,63.741 85.725,62.865 85.725,60.325 82.55,57.15 82.55,46.355 85.09,43.815 120.65,43.815 121.92,42.545 R71.1
"KST_1_1 / Line_Aux": J9.4 U30.3 | length 79.2
  Bottom Layer w0.305: U30.3 29.235,32.41 29.235,37.49 31.75,40.005 63.754,40.005 80.08,23.679 J9.4
Line_Out_L: J7.1 R87.2 | length 5.9
  Bottom Layer w0.305: R87.2 114.3,18.415 115.57,17.145 J7.1
Line_Out_R: J8.1 R98.2 | length 5.2
  Bottom Layer w0.305: J8.1 129.54,18.415 131.497,20.372 131.497,20.727 132.044,21.275 R98.2
Masse: C1.1 C3.1 C8.1 C9.1 C36.1 C38.1 C39.1 C40.1 C41.1 C42.1 C43.1 C44.1 C45.1 C46.1 C47.1 C49.1 C50.1 C51.1 C52.1 C53.1 C54.1 C55.1 C56.1 D3.1 J1.2 J2.2 J3.2 J4.2 J5.2 J6.2 J7.2 J8.2 J9.3 J9.5 J9.9 J10.2 J10.3 J11.2 J12.2 J13.2 J14.2 Q2.2 R8.1 R11.1 R13.1 R14.1 R30.1 R31.1 R34.1 R36.1 R38.1 R39.1 R46.1 R49.1 R52.1 R53.1 R54.1 R55.1 R60.1 R61.1 R62.1 R63.1 R64.1 R65.1 R68.1 R80.1 R81.1 R83.1 R84.1 R88.1 R89.2 R90.1 R94.1 R96.1 R97.2 R99.1 R100.2 R101.1 R102.1 R103.1 R104.1 R106.1 R107.2 U26.12 U27.12 U29.12 U30.10 U30.12
  other v1: 147.32,2.54 58.42,71.12 81.28,71.12 104.14,71.12 147.32,72.39
  other v2: 3.81,3.81 22.86,28.575
Mitten: C5.2 R14.2 U23.10 U23.12 | length 13.4
  Bottom Layer w0.305: C5.2 99.11,68.895 99.904,68.101 100.369,68.101 100.682,67.789 100.756,67.789 101.6,66.945 101.686,66.945 102.183,66.447 102.183,66.092 105.41,62.865 105.41,60.325 U23.10
Mitten_Iso: J13.1 R48.2 | length 2.9
  Bottom Layer w0.305: J13.1 R48.2
Mitten_Line: C21.2 R61.2 R74.1 | length 44.6
  Bottom Layer w0.305: C21.2 R61.2 107.228,63.267 107.548,63.267 107.95,62.865 107.95,59.69 105.41,57.15 105.41,46.355 107.315,44.45 122.555,44.45 124.46,42.545 R74.1
NetC2_1: C2.1 R1.2 R15.1 U22.1 | length 18.1
  Bottom Layer w0.305: R15.1 115.57,65.405 120.65,65.405 121.337,66.092 121.337,66.447 121.884,66.995 C2.1 121.846,67.069 120.891,67.069 119.749,68.211 119.749,68.846 U22.1 114.62,69.215 R1.2
NetC4_1: C4.1 U22.6 U22.7 | length 9.3
  Bottom Layer w0.305: C4.1 118.43,49.215 119.38,50.165 U22.6
NetC4_2: C4.2 R7.1 | length 3.2
  Bottom Layer w0.305: C4.2 R7.1
NetC5_1: C5.1 R4.2 R16.1 U23.1 | length 17.4
  Bottom Layer w0.305: R16.1 92.71,65.405 97.42,65.405 C5.1@99.01,66.995 ; R4.2 96.2,68.895 U23.1 98.167,67.568 98.437,67.568 C5.1@99.01,66.995 ; C5.1 C5.1@99.01,66.995
NetC6_1: C6.1 U23.6 U23.7 | length 9.3
  Bottom Layer w0.305: C6.1 95.57,49.215 96.52,50.165 U23.6
NetC6_2: C6.2 R10.1 | length 3.2
  Bottom Layer w0.305: C6.2 R10.1
NetC7_1: C7.1 R18.2 U30.7 | length 10.1
  Bottom Layer w0.305: U30.7 30.21,20.955 31.324,22.069 31.398,22.069 31.75,22.42 31.75,24.765 30.48,26.035 C7.1
NetC7_2: C7.2 R23.2 R30.2 | length 7
  Bottom Layer w0.305: R30.2 C7.2 R23.2
NetC10_1: C10.1 R22.2 R42.1 U25.1 | length 17.4
  Bottom Layer w0.305: R42.1 47.129,65.544 51.839,65.544 C10.1@53.29,66.995 ; R22.2 50.48,68.895 U25.1 52.447,67.568 52.717,67.568 C10.1@53.29,66.995 ; C10.1 C10.1@53.29,66.995
NetC11_1: C11.1 R68.2 U28.3 U28.12 U29.3 | length 83.8
  Top Layer w0.305: U28.12 59.69,32.385 95.25,32.385 U29.3
  Bottom Layer w0.305: C11.1 38.1,24.765 39.37,26.035 39.37,34.29 43.18,38.1 51.435,38.1 52.07,37.465 52.07,33.02 51.014,31.964 51.014,31.329 U28.3 U28.12 ; U29.3 98.477,33.072 98.477,33.427 99.024,33.975 R68.2
NetC11_2: C11.2 R20.2 U30.8 | length 6.4
  Bottom Layer w0.305: R20.2 U30.8 35.87,20.955 36.19,21.275 C11.2 38.075,21.275 37.527,21.823 C11.2@37.527,21.848
NetC12_1: C12.1 U25.6 U25.7 | length 9.3
  Bottom Layer w0.305: C12.1 49.85,49.215 50.8,50.165 U25.6
NetC12_2: C12.2 R32.1 | length 3.2
  Bottom Layer w0.305: C12.2 R32.1
NetC13_1: C13.1 R25.2 R43.1 U24.1 | length 17.4
  Bottom Layer w0.305: R43.1 69.85,65.405 74.56,65.405 C13.1@76.15,66.995 ; R25.2 73.34,68.895 U24.1 75.307,67.568 75.577,67.568 C13.1@76.15,66.995 ; C13.1 C13.1@76.15,66.995
NetC14_1: C14.1 U24.6 U24.7 | length 9.3
  Bottom Layer w0.305: C14.1 72.71,49.215 73.66,50.165 U24.6
NetC14_2: C14.2 R33.1 | length 3.2
  Bottom Layer w0.305: C14.2 R33.1
NetC15_1: C15.1 R40.2 U28.7 | length 5.5
  Bottom Layer w0.305: U28.7 53.02,20.955 53.18,21.115 53.34,20.955 C15.1
NetC16_1: C16.1 U22.8 U22.9 | length 5.2
  Bottom Layer w0.305: C16.1 126.37,56.195 126.69,56.515 U22.9 U22.8
NetC16_2: C16.2 R47.1 R52.2 | length 5.7
  Bottom Layer w0.305: C16.2 R47.1 R52.2
NetC17_1: C17.1 U23.8 U23.9 | length 5.2
  Bottom Layer w0.305: C17.1 103.51,56.195 103.83,56.515 U23.9 U23.8
NetC17_2: C17.2 R48.1 R53.2 | length 6
  Bottom Layer w0.305: C17.2 R48.1 101.915,50.8 103.825,50.8 R53.2
NetC18_1: C18.1 U24.8 U24.9 | length 5.2
  Bottom Layer w0.305: C18.1 80.65,56.195 80.97,56.515 U24.9 U24.8
NetC18_2: C18.2 R50.1 R54.2 | length 5.7
  Bottom Layer w0.305: C18.2 R50.1 R54.2
NetC19_1: C19.1 U25.8 U25.9 | length 5.4
  Bottom Layer w0.305: C19.1@55.56,56.515 U25.9 U25.8
NetC19_2: C19.2 R51.1 R55.2 | length 5.7
  Bottom Layer w0.305: C19.2 R51.1 R55.2
NetC20_1: C20.1 U22.13 U22.14 | length 5.2
  Bottom Layer w0.305: U22.13 U22.14 129.22,69.215 C20.1
NetC21_1: C21.1 U23.13 U23.14 | length 5.2
  Bottom Layer w0.305: U23.13 U23.14 106.36,69.215 C21.1
NetC22_1: C22.1 U24.13 U24.14 | length 5.2
  Bottom Layer w0.305: U24.13 U24.14 83.5,69.215 C22.1
NetC23_1: C23.1 R56.2 U28.8 | length 5.9
  Bottom Layer w0.305: C23.1 R56.2 56.2,20.955 U28.8
NetC24_1: C24.1 U25.13 U25.14 | length 5.2
  Bottom Layer w0.305: U25.13 U25.14 60.64,69.215 C24.1
NetC25_1: C25.1 R75.1 R76.2 | length 5.9
  Bottom Layer w0.305: R76.2 C25.1 94.03,40.955 94.824,40.161 95.289,40.161 95.602,39.849 95.676,39.849 96.47,39.055 R75.1
NetC26_1: C26.1 R66.2 U29.7 | length 6.7
  Bottom Layer w0.305: U29.7 96.83,20.955 97.15,21.275 R66.2 C26.1 99.024,18.095 98.477,18.643 C26.1@98.477,18.668
NetC27_1: C27.1 R70.2 U26.14 | length 5.4
  Bottom Layer w0.305: C27.1 126.37,35.875 126.676,36.181 126.676,36.195 129.22,36.195 R70.2
NetC27_2: C27.2 R104.2 U26.3 U26.5 U26.10 | length 24.7
  Bottom Layer w0.305: C27.2 124.46,32.385 123.19,31.115 U26.3 120.65,29.845 120.65,27.305 U26.5 128.905,26.035 129.516,26.646 129.516,27.601 R104.2
NetC28_1: C28.1 U26.1 U26.2 | length 5.2
  Bottom Layer w0.305: U26.1 U26.2 121.6,33.655 C28.1
NetC29_2: C29.2 R88.2 U27.3 | length 7.9
  Bottom Layer w0.305: R88.2 22.896,63.815 23.443,64.363 23.443,64.718 24.817,66.092 24.817,66.447 25.044,66.675 25.756,66.675 25.983,66.447 25.983,66.092 U27.3
NetC30_1: C30.1 R85.2 R89.1 | length 5.7
  Bottom Layer w0.305: R85.2 C30.1 R89.1
NetC30_2: C30.2 U27.1 U27.2 | length 5.2
  Bottom Layer w0.305: U27.2 U27.1 30.16,69.215 C30.2
NetC31_1: C31.1 U26.6 U26.7 | length 5.2
  Bottom Layer w0.305: U26.7 U26.6 121.6,23.495 C31.1
NetC31_2: C31.2 R87.1 R90.2 | length 10.8
  Bottom Layer w0.305: R87.1 114.35,23.175 115.144,22.381 115.609,22.381 115.922,22.069 115.996,22.069 116.814,21.251 116.864,21.251 116.864,20.296 117.475,19.685 121.285,19.685 121.896,20.296 121.896,21.251 C31.2
NetC32_1: C32.1 R93.2 U29.8 | length 5.5
  Bottom Layer w0.305: U29.8 106.68,20.955 R93.2@107,21.275 ; R93.2 R93.2@107,21.275 ; C32.1 R93.2@107,21.275
NetC32_2: C32.2 R92.2 R94.2 | length 8.5
  Bottom Layer w0.305: R92.2 110.805,18.095 111.76,19.05 R94.2 111.71,21.275 110.916,22.069 110.842,22.069 110.529,22.381 110.064,22.381 109.27,23.175 C32.2
NetC33_2: C33.2 R99.2 U27.5 | length 10.1
  Bottom Layer w0.305: C33.2 22.91,51.115 25.061,53.266 25.061,53.906 26.244,55.089 26.318,55.089 26.67,55.44 26.67,57.785 U27.5
NetC34_1: C34.1 R95.2 R100.1 | length 7.6
  Bottom Layer w0.305: C34.1 25.45,49.215 26.244,50.009 26.709,50.009 27.022,50.321 27.096,50.321 27.89,51.115 R100.1 27.99,51.115 30.141,53.266 30.141,53.956 R95.2
NetC34_2: C34.2 U27.6 U27.7 | length 6.5
  Bottom Layer w0.305: C34.2 25.436,51.115 25.983,51.663 25.983,52.018 U27.7 U27.6
NetC35_1: C35.1 U26.8 U26.9 | length 5.2
  Bottom Layer w0.305: C35.1 124.78,23.495 U26.9 U26.8
NetC35_2: C35.2 R98.1 R102.2 | length 10.8
  Bottom Layer w0.305: C35.2 124.484,21.251 124.484,20.296 125.095,19.685 128.905,19.685 129.516,20.296 129.516,21.201 130.384,22.069 130.849,22.069 131.162,22.381 131.236,22.381 132.03,23.175 R98.1
NetC36_2: C36.2 D2.2 J10.1 R97.1 | length 34.8
  Bottom Layer w0.305: D2.2 102.84,17.75 102.235,17.145 102.235,12.7 102.87,12.065 123.825,12.065 124.216,12.456 124.216,13.091 J10.1 C36.2 R97.1
NetC37_1: C37.1 R86.2 U27.14 | length 35.6
  Bottom Layer w0.305: C37.1 20.27,56.195 19.722,56.743 19.722,56.793 18.415,58.1 18.415,69.266 20.65,71.501 33.274,71.501 U27.14 37.78,69.215 R86.2
NetC48_1: C48.1 R106.2 U27.10 | length 13.7
  Bottom Layer w0.305: R106.2 33.02,60.325 34.29,59.055 U27.10 36.83,57.785 36.83,52.335 35.61,51.115 C48.1
NetC57_1: C57.1 R105.2 R107.1 | length 7.5
  Bottom Layer w0.305: R107.1 R107.1@30.53,51.115 ; C57.1 32.97,49.215 32.176,50.009 32.102,50.009 31.789,50.321 31.324,50.321 R107.1@30.53,51.115 ; R105.2 32.681,53.956 32.681,53.266 R107.1@30.53,51.115
NetC57_2: C57.2 U27.8 U27.9 | length 6.5
  Bottom Layer w0.305: C57.2 33.056,51.115 33.603,51.663 33.603,52.018 U27.8 U27.9
NetD1_1: D1.1 R79.2 | length 8.7
  Bottom Layer w0.305: D1.1 78.74,41.91 79.375,42.545 83.185,42.545 83.796,41.934 83.796,40.979 R79.2 83.77,40.955 83.222,41.503 83.222,41.553 R79.2@83.197,41.578
NetD2_1: D2.1 D3.2 R92.1 | length 8.2
  Bottom Layer w0.305: D2.1 104.439,14.299 104.439,14.904 106.381,16.846 106.381,17.451 D3.2 107.053,17.75 107.526,17.277 107.526,16.934 108.191,16.269 109.146,16.269 R92.1
NetQ1_1: Q1.1 R76.1 | length 3.6
  Bottom Layer w0.305: Q1.1 88.68,40.955 88.928,40.707 88.928,40.657 90.411,39.174 91.321,39.174 R76.1
NetQ1_3: Q1.3 R79.1 | length 3.2
  Bottom Layer w0.305: R79.1 83.87,39.055 84.664,39.849 84.934,39.849 85.09,40.005 Q1.3
NetQ2_1: Q2.1 R82.3 R84.2 | length 11.3
  Bottom Layer w0.305: Q2.1 R84.2 106.73,40.955 107.685,41.91 113.755,41.91 R82.3
NetQ2_3: Q2.3 R72.1 R75.2 | length 5.7
  Bottom Layer w0.305: R75.2 100.33,40.955 101.141,40.144 101.731,40.144 Q2.3
NetR1_1: R1.1 R9.2 U22.2 | length 7.8
  Bottom Layer w0.305: R9.2 R1.1 114.62,66.675 U22.2
NetR2_1: R2.1 R7.2 | length 3.2
  Bottom Layer w0.305: R2.1 114.383,57.702 115.333,57.702 116.242,56.793 116.242,56.743 116.79,56.195 R7.2
NetR3_3: R3.3 R8.2 | length 2.7
  Bottom Layer w0.305: R8.2 108.574,51.115 108.894,51.435 R3.3
NetR4_1: R4.1 R12.2 U23.2 | length 7.8
  Bottom Layer w0.305: R12.2 R4.1 91.76,66.675 U23.2
NetR5_1: R5.1 R10.2 | length 3.2
  Bottom Layer w0.305: R5.1 91.523,57.702 92.473,57.702 93.382,56.793 93.382,56.743 93.93,56.195 R10.2
NetR6_3: R6.3 R11.2 | length 2.7
  Bottom Layer w0.305: R11.2 85.714,51.115 86.034,51.435 R6.3
NetR17_1: R17.1 R21.2 S1.3 U30.1 | length 35.2
  Bottom Layer w0.305: R17.1 25.364,21.275 24.817,20.727 24.817,20.372 24.13,19.685 17.145,19.685 16.51,20.32 16.51,22.03 17.108,22.627 17.232,22.627 R21.2 17.78,33.655 20.32,36.195 U30.1
NetR17_2: R17.2 R18.1 U30.6 | length 5.3
  Bottom Layer w0.305: R17.2 27.31,23.175 27.63,23.495 28.25,23.495 28.57,23.175 R18.1
NetR19_1: R19.1 R20.1 R23.1 U30.9 | length 18.8
  Bottom Layer w0.305: R23.1 33.02,26.035 U30.9 33.655,21.59 33.655,17.145 34.531,16.269 35.486,16.269 R20.1 36.108,16.743 36.428,16.743 37.232,17.547 37.552,17.547 R19.1 38.15,18.095 R19.1@38.723,18.668
NetR21_1: R21.1 R24.1 S1.2 U30.2 | length 20.7
  Bottom Layer w0.305: R21.1 17.83,21.275 18.624,22.069 19.089,22.069 19.402,22.381 19.476,22.381 20.27,23.175 R24.1 20.32,32.385 21.59,33.655 U30.2
NetR22_1: R22.1 R35.2 U25.2 | length 7.8
  Bottom Layer w0.305: R35.2 R22.1 50.17,66.995 50.49,66.675 U25.2
NetR24_2: R24.2 R31.2 U30.5 | length 9.8
  Bottom Layer w0.305: R24.2 20.37,21.275 21.164,22.069 21.629,22.069 21.942,22.381 22.016,22.381 22.81,23.175 22.896,23.175 23.443,23.723 23.443,24.078 25.4,26.035 U30.5
NetR25_1: R25.1 R37.2 U24.2 | length 7.8
  Bottom Layer w0.305: R37.2 R25.1 68.9,66.675 U24.2
NetR26_1: R26.1 R32.2 | length 3.2
  Bottom Layer w0.305: R26.1 45.803,57.702 46.753,57.702 47.662,56.793 47.662,56.743 48.21,56.195 R32.2
NetR27_3: R27.3 R34.2 | length 2.7
  Bottom Layer w0.305: R34.2 39.994,51.115 40.314,51.435 R27.3
NetR28_1: R28.1 R33.2 | length 3.2
  Bottom Layer w0.305: R28.1 68.663,57.702 69.613,57.702 70.522,56.793 70.522,56.743 71.07,56.195 R33.2
NetR29_3: R29.3 R36.2 | length 2.7
  Bottom Layer w0.305: R36.2 62.854,51.115 63.174,51.435 R29.3
NetR40_1: R40.1 R41.2 U28.6 | length 18.5
  Bottom Layer w0.305: R41.2@41.213,16.768 41.213,16.743 40.665,16.195 R41.2 41.188,16.743 41.508,16.743 41.91,17.145 41.91,18.415 42.545,19.05 48.26,19.05 49.53,20.32 49.53,22.225 U28.6 53.02,23.495 R40.1
NetR41_1: R41.1 R44.3 S2.3 U28.1 | length 26.8
  Bottom Layer w0.305: R41.1 40.64,33.655 43.18,36.195 U28.1
NetR44_1: R44.1 R44.2 R45.1 S2.2 U28.2 | length 23.8
  Bottom Layer w0.305: R45.1 46.67,21.275 45.72,22.225 R44.1 R44.2 43.18,32.385 44.45,33.655 U28.2
NetR45_2: R45.2 R49.2 U28.5 | length 7.9
  Bottom Layer w0.305: R45.2 48.26,24.765 49.53,26.035 U28.5 52.311,27.546 53.261,27.546 R49.2
NetR56_1: R56.1 R57.2 U28.9 | length 19.3
  Bottom Layer w0.305: R56.1 57.79,23.175 58.11,23.495 U28.9 59.69,22.225 59.69,20.32 60.325,19.685 70.485,19.685 71.096,20.296 71.096,21.251 R57.2
NetR57_1: R57.1 R58.1 S3.1 U28.14 | length 23.3
  Bottom Layer w0.305: U28.14 66.04,36.195 68.58,33.655 S3.1 68.663,24.682 69.613,24.682 70.522,23.773 70.522,23.723 71.07,23.175 R57.1
NetR58_2: R58.2 R58.3 R59.1 S3.2 U28.13 | length 23.8
  Bottom Layer w0.305: U28.13 62.23,33.655 63.5,32.385 R58.3 R58.2 66.04,22.225 65.09,21.275 R59.1
NetR59_2: R59.2 R65.2 U28.10 | length 7.1
  Bottom Layer w0.305: R65.2 55.959,27.546 56.909,27.546 60.377,24.078 60.377,23.723 60.924,23.175 R59.2
NetR66_1: R66.1 R67.2 U29.6 | length 20.1
  Bottom Layer w0.305: R67.2@84.393,21.848 84.393,21.823 83.845,21.275 R67.2 83.844,21.251 83.844,20.296 84.455,19.685 94.615,19.685 95.25,20.32 95.25,22.225 U29.6 98.74,23.495 R66.1
NetR67_1: R67.1 R73.3 S4.3 U29.1 | length 24.6
  Bottom Layer w0.305: R67.1 83.844,23.199 83.844,24.154 84.455,24.765 S4.3 86.36,34.925 87.63,36.195 U29.1
NetR69_2: R69.2 R70.1 R71.2 R74.2 R78.2 U26.13 | length 20.6
  Bottom Layer w0.305: R78.2 130.49,39.055 131.445,38.1 131.445,34.925 130.569,34.049 129.614,34.049 R70.1 127.63,33.975 127.31,33.655 U26.13
NetR73_1: R73.1 R73.2 R77.1 S4.2 U29.2 | length 23.8
  Bottom Layer w0.305: R77.1 89.85,21.275 88.9,22.225 R73.2 R73.1 91.44,32.385 92.71,33.655 U29.2
NetR77_2: R77.2 R81.2 U29.5 | length 7.6
  Bottom Layer w0.305: R77.2@94.563,23.748 94.563,23.723 94.016,23.175 R77.2 R81.2 94.03,26.99 94.578,26.442 94.578,26.392 94.935,26.035 U29.5
NetR85_1: R85.1 R86.1 R95.1 R105.1 U27.13 | length 19.4
  Bottom Layer w0.305: R105.1 R95.1 R85.1 30.53,61.915 31.324,62.709 31.398,62.709 31.75,63.06 31.75,64.77 32.385,65.405 34.925,65.405 35.346,65.826 35.346,66.461 U27.13 35.87,66.675 36.19,66.995 R86.1
NetR91_2: R91.2 U29.10 | length 7
  Bottom Layer w0.305: U29.10 107.95,26.035 109.211,27.296 109.211,28.374 R91.2
NetR91_3: R91.3 R96.2 | length 5.8
  Bottom Layer w0.305: R91.3 114.51,32.595 115.811,33.896 116.761,33.896 R96.2
NetR93_1: R93.1 R103.2 U29.9 | length 7.6
  Bottom Layer w0.305: R103.2 101.624,27.601 101.624,26.646 103.926,24.344 103.926,23.709 U29.9 106.36,23.495 R93.1@106.52,23.335
NetU29_13: U29.13 U29.14 | length 2.5
  Bottom Layer w0.305: U29.13 U29.14
NetU30_13: U30.13 U30.14 | length 2.5
  Bottom Layer w0.305: U30.13 U30.14
VU_In: C28.2 R82.1 R82.2 R83.2 R91.1 | length 33.9
  Bottom Layer w0.305: R82.2 113.36,40.005 R82.1 116.037,40.382 116.217,40.382 116.79,40.955 116.89,40.955 117.684,40.161 117.758,40.161 118.11,39.81 118.11,38.1 118.745,37.465 121.285,37.465 121.896,36.854 121.896,35.899 122.468,35.327 122.592,35.327 123.19,34.73 123.19,33.02 122.555,32.385 116.84,32.385 115.57,31.115 115.57,28.485 R91.1
pads on no net: J9.1 S1.1 S2.1 S3.3 S4.1
copper on no net:
  other v1: 2.54,72.39

## Polygon pours and split planes (outlines as drawn)
Masse on Bottom Layer "Top Layer-No Net" (solid, pour order 2): 0,0 150,0 150,75 0,75
Masse on Top Layer "Top Layer-No Net1" (solid, pour order 3): 0,0 150,0 150,75 0,75

## Silkscreen, mask and mechanical layers (free items; w line width, h text height)
Top Overlay:
  text "DiKo PreAmp 1.0 Ausgangsstufe" at 5.08,5.08 h1.78
Mechanical 1:
  the board outline again, w0.254

## Text inside footprints (layer, text, board x,y; h text height)
R3: Top Overlay "1" at 114.3,47.117 h1.52; Top Overlay "2" at 111.252,47.117 h1.52; Top Overlay "3" at 108.712,47.117 h1.52
R6: Top Overlay "3" at 85.852,47.117 h1.52; Top Overlay "1" at 91.44,47.117 h1.52; Top Overlay "2" at 88.392,47.117 h1.52
R27: Top Overlay "3" at 40.132,47.117 h1.52; Top Overlay "2" at 42.672,47.117 h1.52; Top Overlay "1" at 45.72,47.117 h1.52
R29: Top Overlay "3" at 62.992,47.117 h1.52; Top Overlay "2" at 65.532,47.117 h1.52; Top Overlay "1" at 68.58,47.117 h1.52
R44: Top Overlay "3" at 40.132,20.447 h1.52; Top Overlay "2" at 42.672,20.447 h1.52; Top Overlay "1" at 45.72,20.447 h1.52
S1: Top Overlay "3" at 17.272,26.797 h1.52; Top Overlay "2" at 19.812,26.797 h1.52; Top Overlay "1" at 22.86,26.797 h1.52
S3: Top Overlay "3" at 62.992,20.447 h1.52; Top Overlay "2" at 65.532,20.447 h1.52; Top Overlay "1" at 68.58,20.447 h1.52
S4: Top Overlay "3" at 85.852,20.447 h1.52; Top Overlay "2" at 88.392,20.447 h1.52; Top Overlay "1" at 91.44,20.447 h1.52